# Altium PCB FrolfLight.PcbDoc
Units mil, origin at the board's own origin, x right, y up, seen from the top; angles counter-clockwise.
Board outline 1160 x 785 mil, 2 copper layers (Top Layer, Bottom Layer); 12 components, 8 nets, 34 pads, 5 vias.
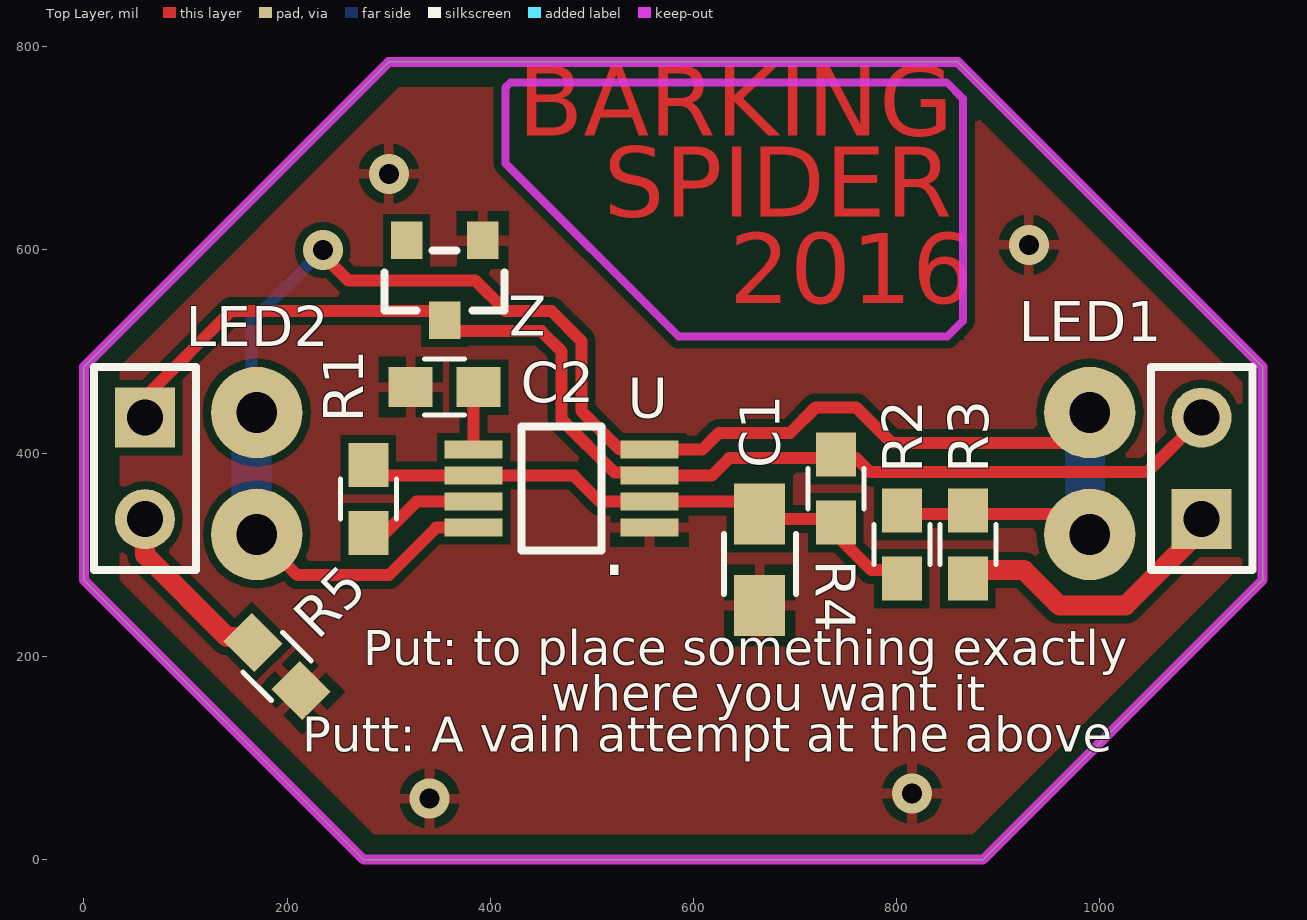
[diagram p0: Top Layer view]
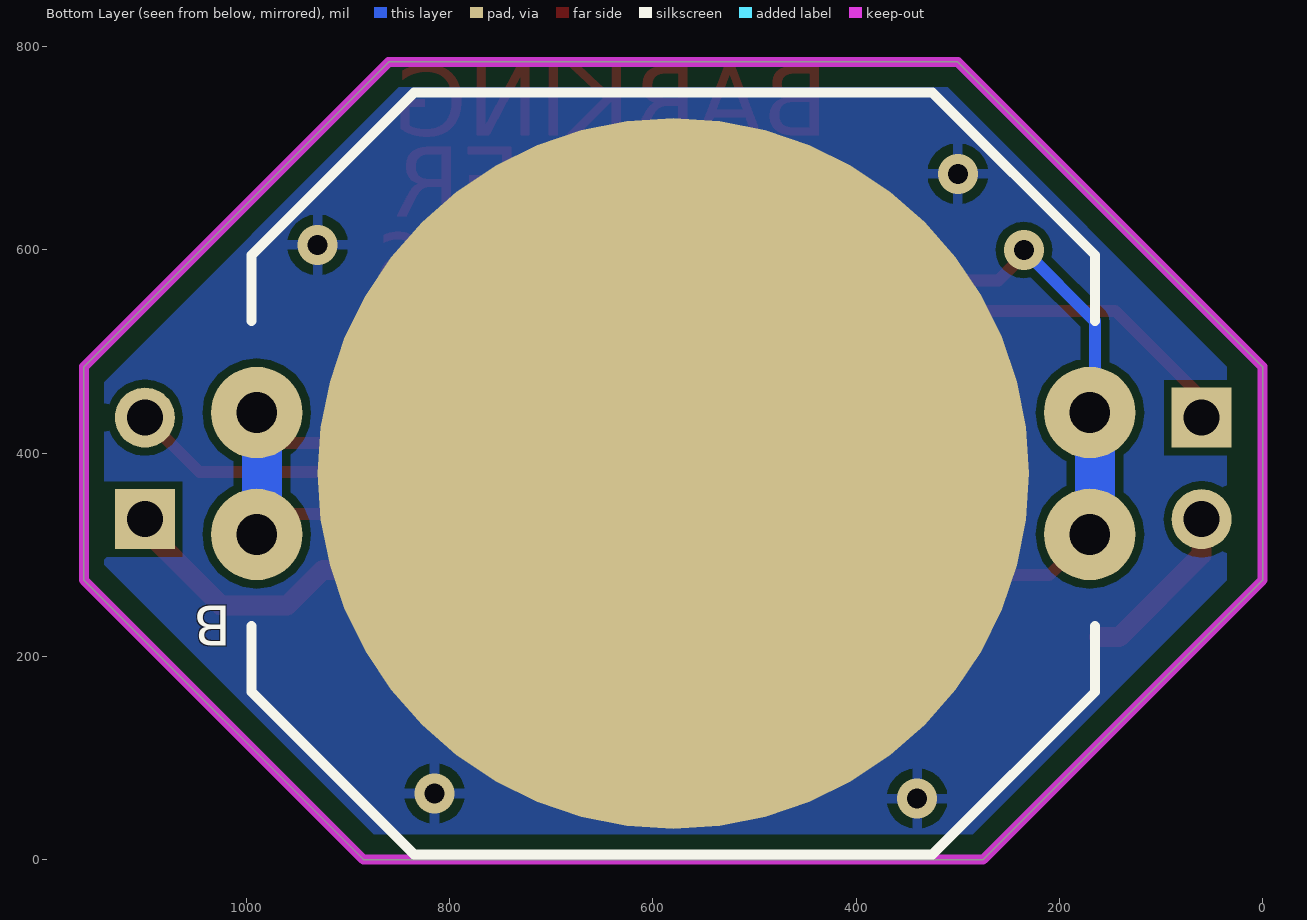
[diagram p1: Bottom Layer view, seen from below]

## Layer stack, top to bottom
Top Layer: signal copper 1.4
Dielectric: dielectric 12.6, FR-4, Dk 4.8
Bottom Layer: signal copper 1.4

## Board outline
275,0 0,275 0,485 300,785 860,785 1160,485 1160,275 885,0

## Design rules (kind name [scope] priority, off if disabled: settings)
Clearance Clearance_HV [InNet('HV1') OR InNet('HV2') vs NOT(InNet('HV1') OR InNet('HV2') OR InNet('NO_CLEAR_1') OR InNet('NO_CLEAR_2') OR NOT(InNetClass('All Nets')))] p1: gap=118.11
Clearance Clearance_NOCLEAR [InNet('NO_CLEAR_1') OR InNet('NO_CLEAR_2') vs InNet('GND')] p2: gap=118.11
Clearance Clearance_HVGND [InNet('GND_HV') vs NOT(InNet('GND_HV') OR NOT(InNetClass('All Nets')))] p3: gap=118.11
Clearance [All] p4: gap=7.87
FabricationTestPointUsage TestPointUsage [All] p1: valid=0 allowmultiple=FALSE
FabricationTestpoint Testpoint [All] p1: side=3 testpointundercomponent=TRUE minsize=40 maxsize=100 preferedsize=60 minholesize=0 maxholesize=40 preferedholesize=32 testpointgrid=1 allowsidetop=TRUE allowsidebottom=TRUE usegrid=TRUE gridtolerance=0.01
HoleSize [All] p1: absolutevalues=TRUE maxlimit=177.17 minlimit=9.84 maxpercent=80.000 minpercent=20.000
MinimumSolderMaskSliver [All] p1: minsoldermaskwidth=3.94
PlaneConnect SurgeGndConnect [InNet('GND')] p1: planeconnectstyle=Relief reliefexpansion=19.68 reliefentries=4 reliefconductorwidth=19.68 reliefairgap=19.68
PlaneConnect [All] p2: planeconnectstyle=Relief reliefexpansion=20 reliefentries=4 reliefconductorwidth=10 reliefairgap=10
PolygonConnect PolygonConnect_Surge [InComponent('B') and InNet('GND')] p1: connectstyle=Direct reliefconductorwidth=19.68 reliefentries=4 polygonreliefangle="90 Angle" airgapwidth=19.68
PolygonConnect [All] p2: connectstyle=Relief reliefconductorwidth=10 reliefentries=4 polygonreliefangle="90 Angle" airgapwidth=10
RoutingVias [All] p1: holewidth=15.75 width=31.5 viastyle="Through Hole" minholewidth=9.84 minwidth=15.75 maxholewidth=118.11 maxwidth=157.48
SilkToSilkClearance [All] p1: silktosilkclearance=0
SilkToSolderMaskClearance SilkscreenOverComponentPads [IsPad] p1: minsilkscreentomaskgap=3.94 clearancetoexposedcopper=TRUE
SolderMaskExpansion [All] p1: expansion=4
Width [All] p1: maxlimit=157.48 minlimit=7.87 preferedwidth=30 toplayer_prefwidth=10 minimp=50.000000 maximp=50.000000 favimp=50.000000
21 further rules are at their usual default settings.

## Components (designator, comment, footprint, x,y, rotation, side; value= is the part's Value field where it differs from the comment)
B "BAT-HLD-001-THM" Batt 580,380 r0 bottom
C1 "" 0805 665,295 r270 top
C2 "" 0603 355,465 r180 top
LED1 "" HDR1X2 1100,335 r90 top
LED2 "" HDR1X2 60,435 r270 top
R1 "Res1" 0603 280,355 r270 top
R2 "Res1" 0603 805,310 r90 top
R3 "Res1" 0603 870,310 r270 top
R4 "Res1" 0603 740,365 r90 top
R5 "Res1" 0603 190,190 r135 top
U "LMC555CMX/NOPB" 555 470,365 r90 top
Z "" SOT-23_DIODE 355,570 r180 top

## Footprints (in the part's own frame and the unit in brackets; to place one, negate y for a bottom-side part, rotate by r counter-clockwise, add the part's x,y. Pads: shape width x height; smd on the part's side, far side on the other; paste and mask are expansions set on the pad)
555 [mm]
  rect 0.45x1.45 smd: 1(-0.975,-2.2) 2(-0.325,-2.2) 3(0.325,-2.2) 4(0.975,-2.2) 5(0.975,2.2) 6(0.325,2.2) 7(-0.325,2.2) 8(-0.975,2.2)
  silkscreen extent -1.55,-1 1.55,1
0603 [mm] "Chip Capacitor; Body 1.6 x 0.8 mm (LxW typ)"
  rect 1.1x1 smd: 1(-0.85,0) 2(0.85,0)
  silkscreen extent -0.5,-0.7 0.5,0.7, body extent -0.8,-0.4 0.8,0.4, height 0.5
0805 [mil]
  rect 60x50 smd: 1(-45,0) 2(45,0)
  silkscreen extent -26,-35 33,36, body extent -39,-28 39,28, height 28
Batt [mil]
  round 90 hole 40: 1(-410,-60) 1(-410,60) 1(410,-60) 1(410,60)
  round 700 smd: 2(0,0)
  silkscreen extent -415,-375 415,375
HDR1X2 [mm] "Connector; Header; 2 Position"
  rect 1.5x1.5 hole 0.9: 1(0,0)
  round 1.5 hole 0.9: 2(2.54,0)
  silkscreen extent -1.27,-1.27 3.81,1.27
SOT-23_DIODE [mil]
  rect 31x37 smd: A(-37.4,-39.37) K(0,39.37) ""(37.4,-39.37)
  silkscreen extent -59,-30 59,30, body extent -59,-30 59,30, height 47

## Part data
B: library part Component_1
C1 C2: library part CAP
LED1 LED2: library part "Header 2", "Header, 2-Pin"
R1 R2 R3 R4 R5: "Resistor"
U: library part 555
Z: library part "DIODE, ZENER"

## Via types
v1: diameter 39.37, hole 19.68, Top Layer to Bottom Layer, 5 vias

## Nets (pads, with @x,y where several pads share a name; then routed paths per layer and width w, separated by ;. In a path a pad name is that pad's centre, name@x,y a point inside that pad or via, vN(x,y) a via of type N, cw(c..) or ccw(c..) an arc to the next point about the centre after c; other vN are vias at no path point)
GND: B.2 C1.2 C2.2 R5.1 U.1 Z.A
  other v1: 340,60 815,65 930,605 300,675
NetC1_1: C1.1 R1.1 R2.1 R4.1 U.2 U.6 | length 571.5
  Top Layer w11.81: R1.1@287.8,377.8 U.6 482.2,377.8 507.8,352.2 U.2 647.8,352.2 665,335 735,335 740,340 740,320 775,285 R2.1@805,285
NetC2_1: C2.1 U.5 | length 61.6
  Top Layer w11.81: U.5 C2.1@383.39,465
NetLED1_1: LED1.1 R3.2 | length 285.6
  Top Layer w19.68: R3.2@870,285 925,285 960,250 1025,250 1100,325 LED1.1
NetLED1_2: LED1.2 LED2.1 R4.2 U.3 Z.K | length 1236.8
  Top Layer w11.81: LED2.1 60,455 145,540 345.63,540 365.63,520 450.13,520 470,500.13 470,433.11 522.36,380.75 553.66,380.75 U.3 617.8,377.8 635,395 760,395 773.78,381.22 1046.22,381.22 LED1.2
NetLED2_2: LED2.2 R5.2 | length 169.7
  Top Layer w19.68: LED2.2 60,300 141.11,218.89 R5.2@161.11,218.89
NetR1_2: R1.2 U.7 | length 118.8
  Top Layer w11.81: R1.2@280,315 290,315 327.2,352.2 U.7
VCC: B.1 R2.2 R3.1 U.4 U.8 | length 1795.5
  Top Layer w11.81: B.1@170,320 210,280 300,280 346.61,326.61 U.8 ; v1(235,600) 235,595 260,570 385,570 415,540 460,540 489.68,510.32 489.68,441.27 527.56,403.39 U.4 608.39,403.39 625,420 695,420 720,445 760,445 795,410 960,410 B.1@990,440 ; R2.2@805,340 970,340 B.1@990,320
  Bottom Layer w11.81: B.1@165,440 165,530 v1(235,600)
  Bottom Layer w39.37: B.1@165,320 B.1@165,440 ; B.1@985,320 B.1@985,440
pads on no net: Z.

## Polygon pours and split planes (outlines as drawn)
GND on Bottom Layer "Poly_GND_Bot" (solid, remove dead copper, pour order 4): 35,275 285,25 875,25 1140,290 1140,470 850,760 310,760 35,485
GND on Top Layer "Poly_GND_Top" (solid, remove dead copper, pour order 3): 35,275 285,25 875,25 1140,290 1140,470 850,760 310,760 35,485

## Keep-outs
Top Layer:
  lines w7.87: 415,685 585,515 850,515 865,530 865,749.15 849.15,765 420,765 415,760 415,685
Keep-Out Layer:
  the board outline again, w10

## Other copper
Top Layer:
  text "BARKING" at 427,690 h118.11
  text "SPIDER" at 511.71,610 h118.11
  text "2016" at 635,525 h118.11

## Silkscreen, mask and mechanical layers (free items; w line width, h text height)
Top Overlay:
  text "Put: to place something exactly" at 275,180 h59.06
  text "where you want it" at 460,135 h59.06
  text "Putt: A vain attempt at the above" at 215,95 h59.06
Top Solder:
  rectangle: 555,555 825,725
  rectangle: 455,655 560,725
  rectangle: 505,605 560,670
  lines w39.37: 440,695 595,540 840,540 840,740 440,740 440,695
Mechanical 13:
  lines w10: 35,275 285,25 875,25 1140,290 1140,470 850,760 310,760 35,485 35,275